# EAGLE board interface (EAGLE 5.01)
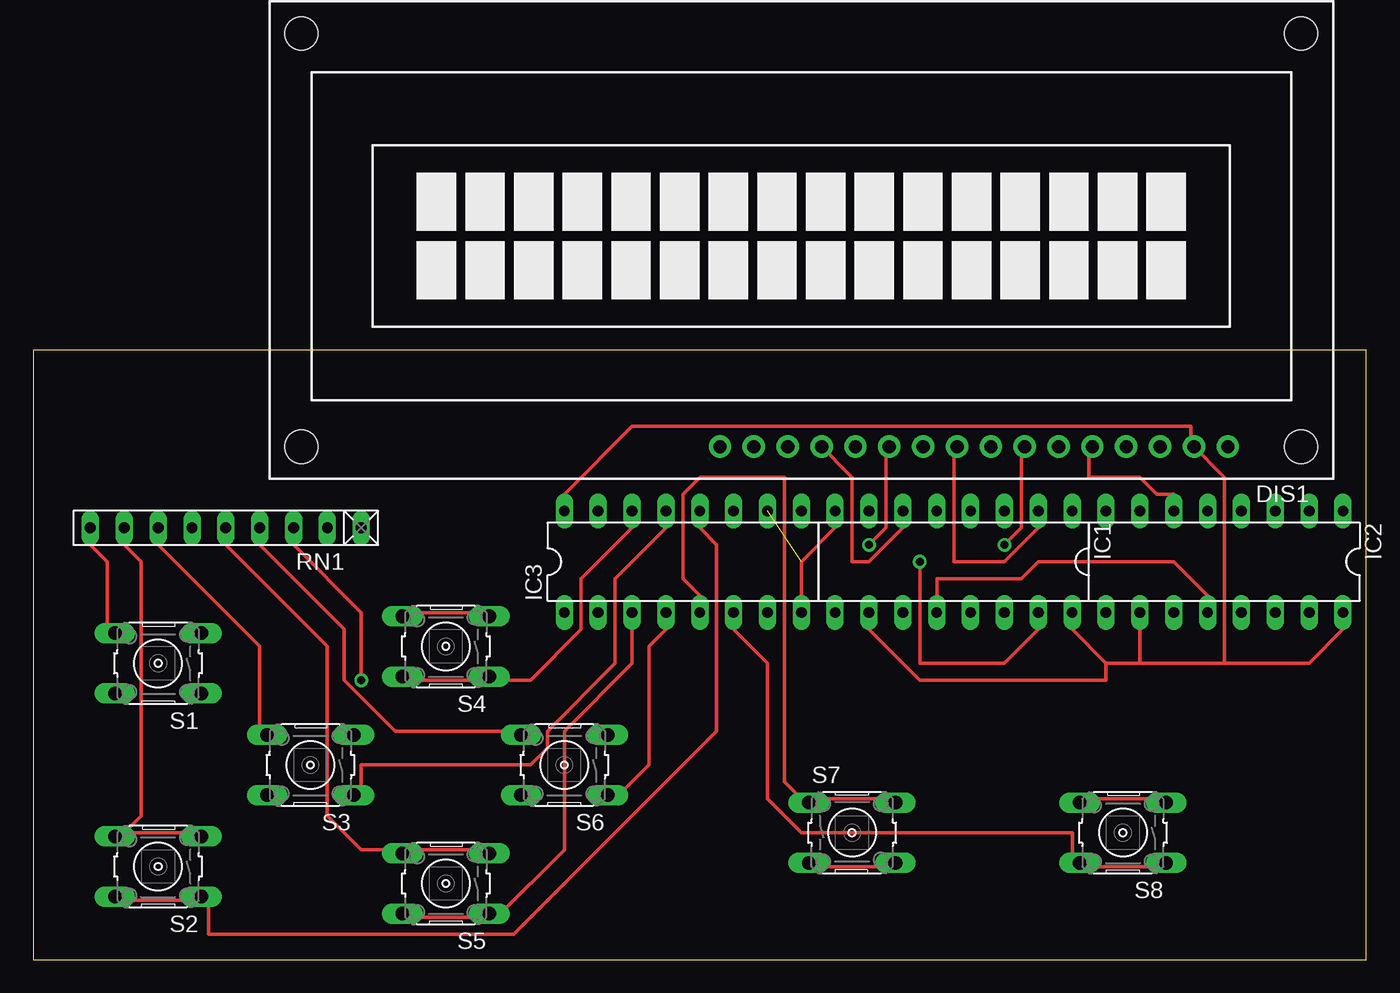
[diagram p0: board, top side]
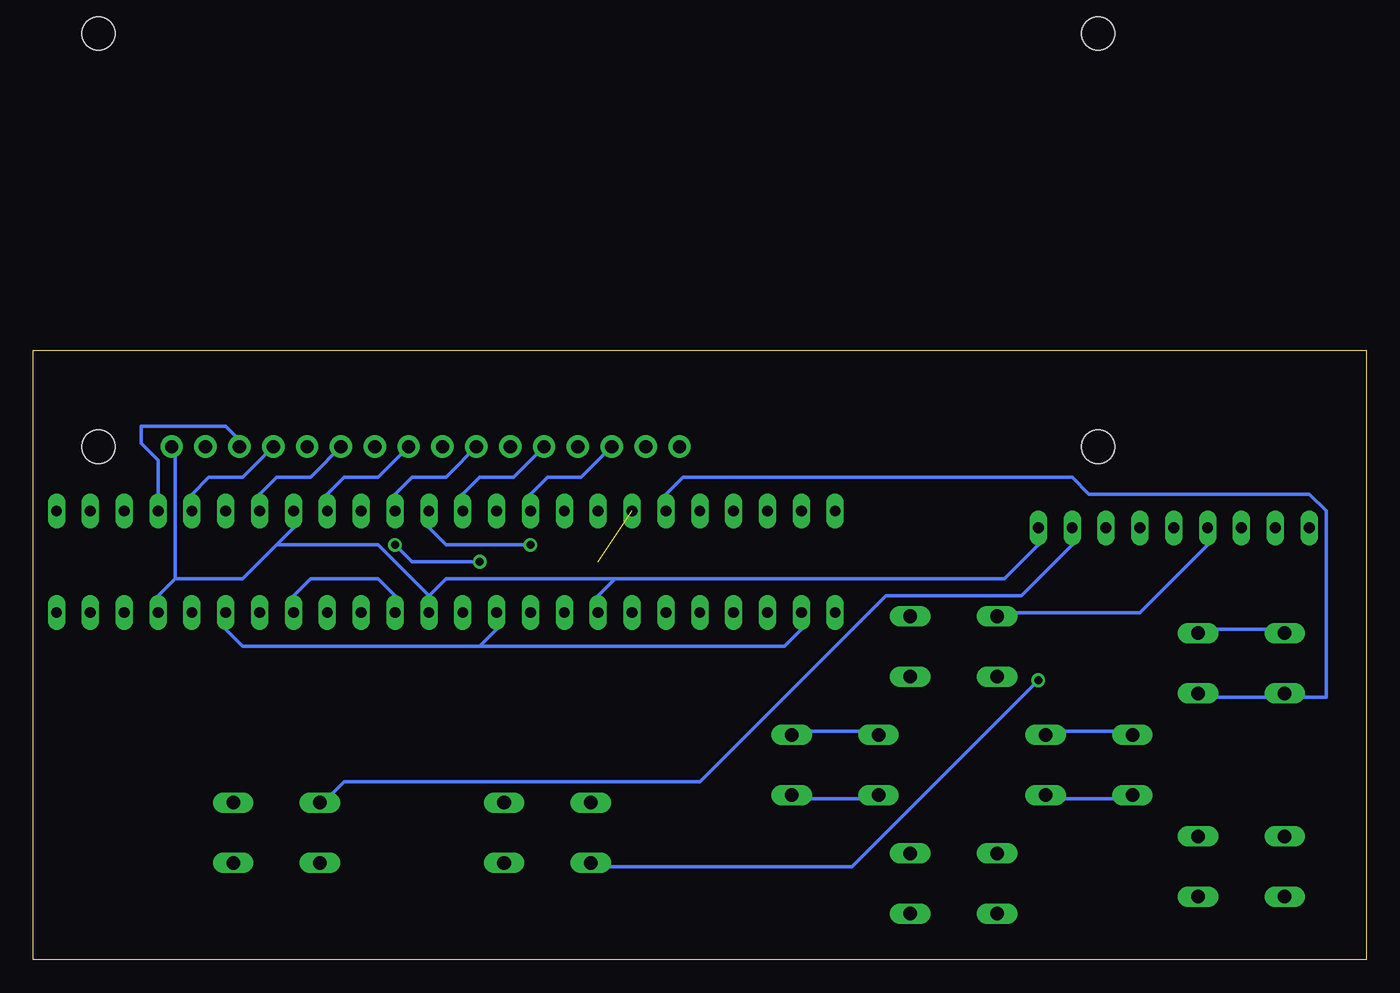
[diagram p1: board, bottom side, seen from below]

Size 100 x 45.71 mm. Coordinates in mm from the lower left corner, seen from the top.
Outline: 100,45.71 0,45.71 0,0 100,0 100,45.71
Copper layers (1*16): Top 0.035mm / dielectric 1.5mm / Bottom 0.035mm
Design rules "default": minimum track width 10mil, minimum drill 24mil, track to track 8mil, track to pad 8mil, pad to pad 8mil, via to via 8mil, smd to smd 8mil, copper to edge 40mil, drill to drill 8mil, minimum pad ring 10mil, minimum via ring 8mil, stop-mask expansion 4mil, vias tented up to drill 0mil, thermal gap 10mil

## Footprints (pad centres in the part's own frame; a part is rotated, then mirrored left to right if it is on the bottom)
TUXGR_16X2_R2 = drill 1 pad 1.676 round: 1 -32,15.5; 2 -29.46,15.5; 3 -26.92,15.5; 4 -24.38,15.5; 5 -21.84,15.5; 6 -19.3,15.5; 7 -16.76,15.5; 8 -14.22,15.5; 9 -11.68,15.5; 10 -9.14,15.5; 11 -6.6,15.5; 12 -4.06,15.5; 13 -1.52,15.5; 14 1.02,15.5; 15 3.56,15.5; 16 6.1,15.5 | hole 2.5: -37.5,-15.5; 37.5,-15.5; -37.5,15.5; 37.5,15.5
DIL16 = drill 0.813 long: 1 -8.89,-3.81; 2 -6.35,-3.81; 3 -3.81,-3.81; 4 -1.27,-3.81; 5 1.27,-3.81; 6 3.81,-3.81; 7 6.35,-3.81; 8 8.89,-3.81; 9 8.89,3.81; 10 6.35,3.81; 11 3.81,3.81; 12 1.27,3.81; 13 -1.27,3.81; 14 -3.81,3.81; 15 -6.35,3.81; 16 -8.89,3.81
RN-9 = drill 0.813 long: 1 -10.16,0; 2 -7.62,0; 3 -5.08,0; 4 -2.54,0; 5 0,0; 6 2.54,0; 7 5.08,0; 8 7.62,0; 9 10.16,0
B3F-10XX = drill 1.016 long: 1 -3.251,2.261; 2 3.251,2.261; 3 -3.251,-2.261; 4 3.251,-2.261

## Placement (x,y rotation side)
DIS1  TUXGR_16X2_R2  [TUXGR_16X2_R2]  57.62,53.97 180 top
IC1  74LS595N  [DIL16]  69.05,29.84 180 top
IC2  74LS595N  [DIL16]  89.37,29.84 180 top
IC3  74LS165N  [DIL16]  48.73,29.84 0 top
RN1  100K  [RN-9]  14.44,32.38 180 top
S1  [B3F-10XX]  9.36,22.22 180 top
S2  [B3F-10XX]  9.36,6.98 180 top
S3  [B3F-10XX]  20.79,14.6 180 top
S4  [B3F-10XX]  30.95,23.49 180 top
S5  [B3F-10XX]  30.95,5.71 180 top
S6  [B3F-10XX]  39.84,14.6 180 top
S7  [B3F-10XX]  61.43,9.52 0 top
S8  [B3F-10XX]  81.75,9.52 180 top

## Library data of the parts
DIS1 = display-lcd
IC1-IC3 = 74xx-us
RN1 = resistor-net
S1-S8 = switch-omron

## Nets
BUTTON_LATCH: IC3.1
CLOCK: IC1.11 IC2.11 IC3.2
GND: DIS1.1 IC1.8 IC1.13 IC2.8 IC2.13 IC3.8 IC3.10 RN1.1
LCD_LATCH: IC1.12 IC2.12
MISO: IC3.9
MOSI: IC2.14
N$1: DIS1.7 IC1.15
N$2: DIS1.8 IC1.1
N$3: DIS1.9 IC1.2
N$4: DIS1.10 IC1.3
N$5: DIS1.11 IC1.4
N$6: DIS1.12 IC1.5
N$7: DIS1.13 IC1.6
N$8: DIS1.14 IC1.7
N$9: DIS1.6 IC2.7
N$10: DIS1.5 IC2.6
N$11: DIS1.4 IC2.5
N$12: DIS1.3 IC2.4
N$13: IC1.14 IC2.9
N$14: RN1.9 S1.3 S1.4
N$15: RN1.8 S2.3 S2.4
N$16: RN1.7 S3.3 S3.4
N$17: RN1.6 S4.3 S4.4
N$18: RN1.5 S5.3 S5.4
N$19: RN1.4 S6.3 S6.4
N$20: RN1.3 S7.3 S7.4
N$21: RN1.2 S8.3 S8.4
N$22: IC3.11 S1.1 S1.2
N$23: IC3.12 S2.1 S2.2
N$24: IC3.13 S3.1 S3.2
N$25: IC3.14 S4.1 S4.2
N$26: IC3.3 S5.1 S5.2
N$27: IC3.4 S6.1 S6.2
N$28: IC3.5 S7.1 S7.2
N$29: IC3.6 S8.1 S8.2
VCC: DIS1.2 IC1.10 IC1.16 IC2.10 IC2.16 IC3.16

## Tracks (layer width: path | path; a pad name or v marks a point on that pad's centre or on a via)
CLOCK
  Bottom 0.254: 66.51,23.49 84.29,23.49 85.56,24.76 IC2.11 | 66.51,23.49 65.24,24.76 IC1.11 | 66.51,23.49 43.65,23.49 42.38,24.76 IC3.2
GND  (1 unrouted)
  Top 0.254: IC1.8 60.16,32.38 57.62,29.84 IC3.8
  Bottom 0.254: 81.75,31.11 84.29,28.57 89.37,28.57 | 81.75,31.11 80.48,32.38 IC2.8 | 89.37,28.57 90.64,27.3 IC2.13 | 70.32,27.3 74.13,31.11 81.75,31.11 | 89.37,28.57 89.37,38.73 DIS1.1 | 56.35,28.57 27.14,28.57 24.6,31.11 RN1.1 | 56.35,28.57 57.62,27.3 IC3.8 | 70.32,27.3 69.05,28.57 56.35,28.57 | 70.32,27.3 IC1.13
LCD_LATCH
  Top 0.254: IC2.12 88.1,27.3 85.56,29.84 75.4,29.84 74.13,28.57 67.78,28.57 IC1.12
N$1  (via drill 0.61)
  Top 0.254: v66.51,29.84 66.51,22.22 72.86,22.22 75.4,24.76 IC1.15 | v72.86,31.11 74.13,32.38 74.13,38.73 DIS1.7
  Bottom 0.254: v66.51,29.84 71.59,29.84 v72.86,31.11
N$2
  Bottom 0.254: IC1.1 77.94,34.92 76.67,36.19 74.13,36.19 71.59,38.73 DIS1.8
N$3
  Top 0.254: IC1.2 75.4,32.38 72.86,29.84 69.05,29.84 69.05,38.73 DIS1.9
N$4
  Bottom 0.254: IC1.3 72.86,34.92 71.59,36.19 69.05,36.19 66.51,38.73 DIS1.10
N$5  (via drill 0.61)
  Top 0.254: v62.7,31.11 63.97,32.38 63.97,38.73 DIS1.11
  Bottom 0.254: v62.7,31.11 69.05,31.11 70.32,32.38 IC1.4
N$6
  Bottom 0.254: IC1.5 67.78,34.92 66.51,36.19 63.97,36.19 61.43,38.73 DIS1.12
N$7
  Top 0.254: IC1.6 65.24,32.38 62.7,29.84 61.43,29.84 61.43,36.19 58.89,38.73 DIS1.13
N$8
  Bottom 0.254: IC1.7 62.7,34.92 61.43,36.19 58.89,36.19 56.35,38.73 DIS1.14
N$9
  Bottom 0.254: IC2.7 83.02,34.92 81.75,36.19 79.21,36.19 76.67,38.73 DIS1.6
N$10
  Top 0.254: IC2.6 85.56,34.92 84.29,34.92 83.02,36.19 79.21,36.19 79.21,38.73 DIS1.5
N$11
  Bottom 0.254: IC2.5 88.1,34.92 86.83,36.19 84.29,36.19 81.75,38.73 DIS1.4
N$12
  Bottom 0.254: IC2.4 90.64,37.46 91.91,38.73 91.91,40 85.56,40 84.29,38.73 DIS1.3
N$13
  Bottom 0.254: IC2.9 80.48,27.3 79.21,28.57 74.13,28.57 72.86,27.3 IC1.14
N$14
  Top 0.254: RN1.9 4.28,31.11 5.55,29.84 5.55,24.76 S1.4
  Bottom 0.254: S1.3 11.9,24.76 6.82,24.76 S1.4
N$15
  Top 0.254: 6.82,9.52 8.09,10.79 8.09,29.84 6.82,31.11 RN1.8 | 6.82,9.52 11.9,9.52 S2.3 | 6.82,9.52 S2.4
N$16
  Top 0.254: RN1.7 9.36,31.11 16.98,23.49 16.98,17.14 S3.4
  Bottom 0.254: S3.3 23.33,17.14 18.25,17.14 S3.4
N$17
  Top 0.254: S4.3 33.49,26.03 28.41,26.03 S4.4
  Bottom 0.254: RN1.6 11.9,31.11 16.98,26.03 27.14,26.03 S4.4
N$18
  Top 0.254: RN1.5 14.44,31.11 22.06,23.49 22.06,10.79 24.6,8.25 27.14,8.25 S5.4 28.41,8.25 33.49,8.25 S5.3
N$19
  Top 0.254: RN1.4 16.98,31.11 23.33,24.76 23.33,20.95 27.14,17.14 36.03,17.14 S6.4
  Bottom 0.254: S6.3 42.38,17.14 37.3,17.14 S6.4
N$20  (via drill 0.61)
  Top 0.254: v24.6,20.95 24.6,26.03 19.52,31.11 RN1.3 | S7.4 63.97,6.98 58.89,6.98 S7.3
  Bottom 0.254: v24.6,20.95 38.57,6.98 57.62,6.98 S7.3
N$21
  Top 0.254: S8.3 84.29,12.06 79.21,12.06 S8.4
  Bottom 0.254: RN1.2 22.06,31.11 25.87,27.3 36.03,27.3 50,13.33 76.67,13.33 77.94,12.06 S8.4
N$22
  Bottom 0.254: IC3.11 52.54,34.92 51.27,36.19 22.06,36.19 20.79,34.92 4.28,34.92 3.01,33.65 3.01,19.68 5.55,19.68 S1.2 6.82,19.68 11.9,19.68 S1.1
N$23
  Top 0.254: IC3.12 50,32.38 51.27,31.11 51.27,17.14 36.03,1.9 13.17,1.9 13.17,4.44 S2.1 11.9,4.44 6.82,4.44 S2.2
N$24
  Top 0.254: IC3.13 47.46,32.38 43.65,28.57 43.65,22.22 38.57,17.14 38.57,15.87 37.3,14.6 24.6,14.6 24.6,12.06 S3.1
  Bottom 0.254: S3.2 18.25,12.06 23.33,12.06 S3.1
N$25
  Top 0.254: IC3.14 44.92,32.38 41.11,28.57 41.11,24.76 37.3,20.95 34.76,20.95 S4.1 33.49,20.95 28.41,20.95 S4.2
N$26
  Top 0.254: IC3.3 44.92,22.22 39.84,17.14 39.84,8.25 34.76,3.17 S5.1 33.49,3.17 28.41,3.17 S5.2
N$27
  Top 0.254: IC3.4 47.46,24.76 46.19,23.49 46.19,14.6 43.65,12.06 S6.1
  Bottom 0.254: S6.2 37.3,12.06 42.38,12.06 S6.1
N$28
  Top 0.254: IC3.5 50,27.3 48.73,28.57 48.73,34.92 50,36.19 56.35,36.19 56.35,13.33 57.62,12.06 S7.1 58.89,12.06 63.97,12.06 S7.2
N$29
  Top 0.254: IC3.6 52.54,24.76 55.08,22.22 55.08,12.06 57.62,9.52 77.94,9.52 77.94,6.98 S8.2 79.21,6.98 84.29,6.98 S8.1
VCC
  Top 0.254: 89.37,22.22 83.02,22.22 | 89.37,22.22 95.72,22.22 98.26,24.76 IC2.16 | 83.02,22.22 IC2.10 | 80.48,22.22 77.94,24.76 IC1.16 | 83.02,22.22 80.48,22.22 | 80.48,22.22 80.48,20.95 66.51,20.95 62.7,24.76 IC1.10 | 86.83,38.73 86.83,40 44.92,40 39.84,34.92 IC3.16 | 89.37,22.22 89.37,36.19 86.83,38.73 | DIS1.2 86.83,38.73